# EAGLE board printbrd (EAGLE 7.6.0)
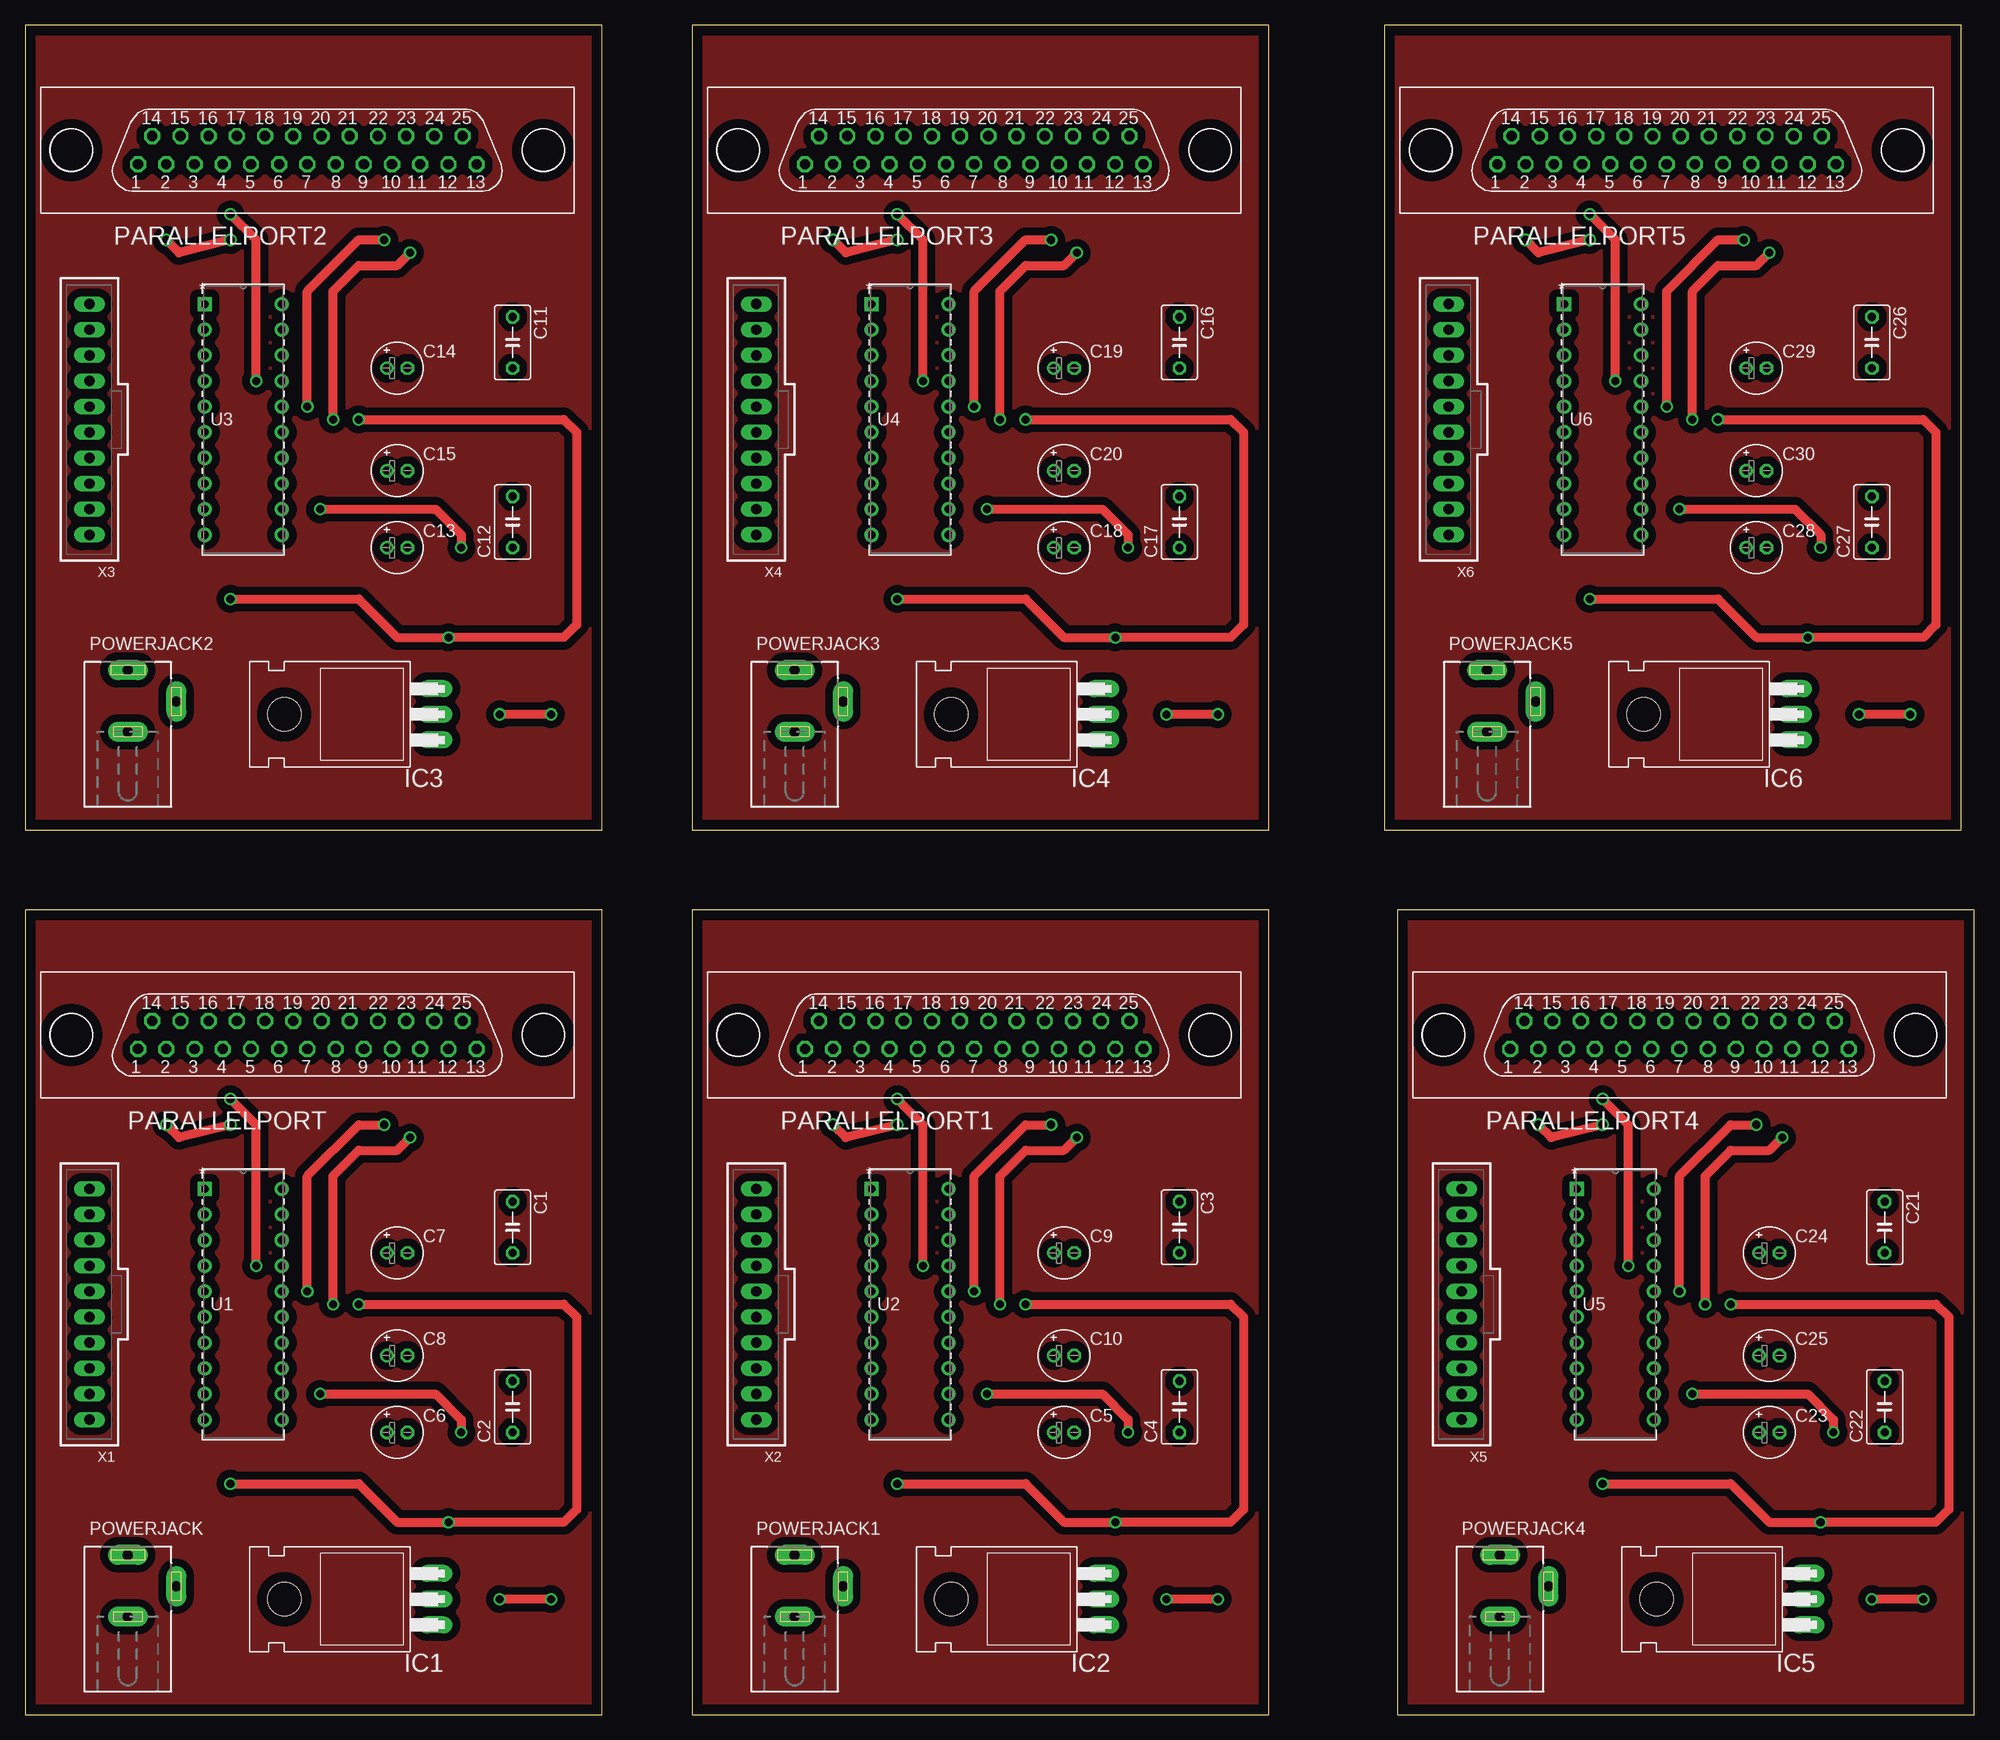
[diagram p0: board, top side]
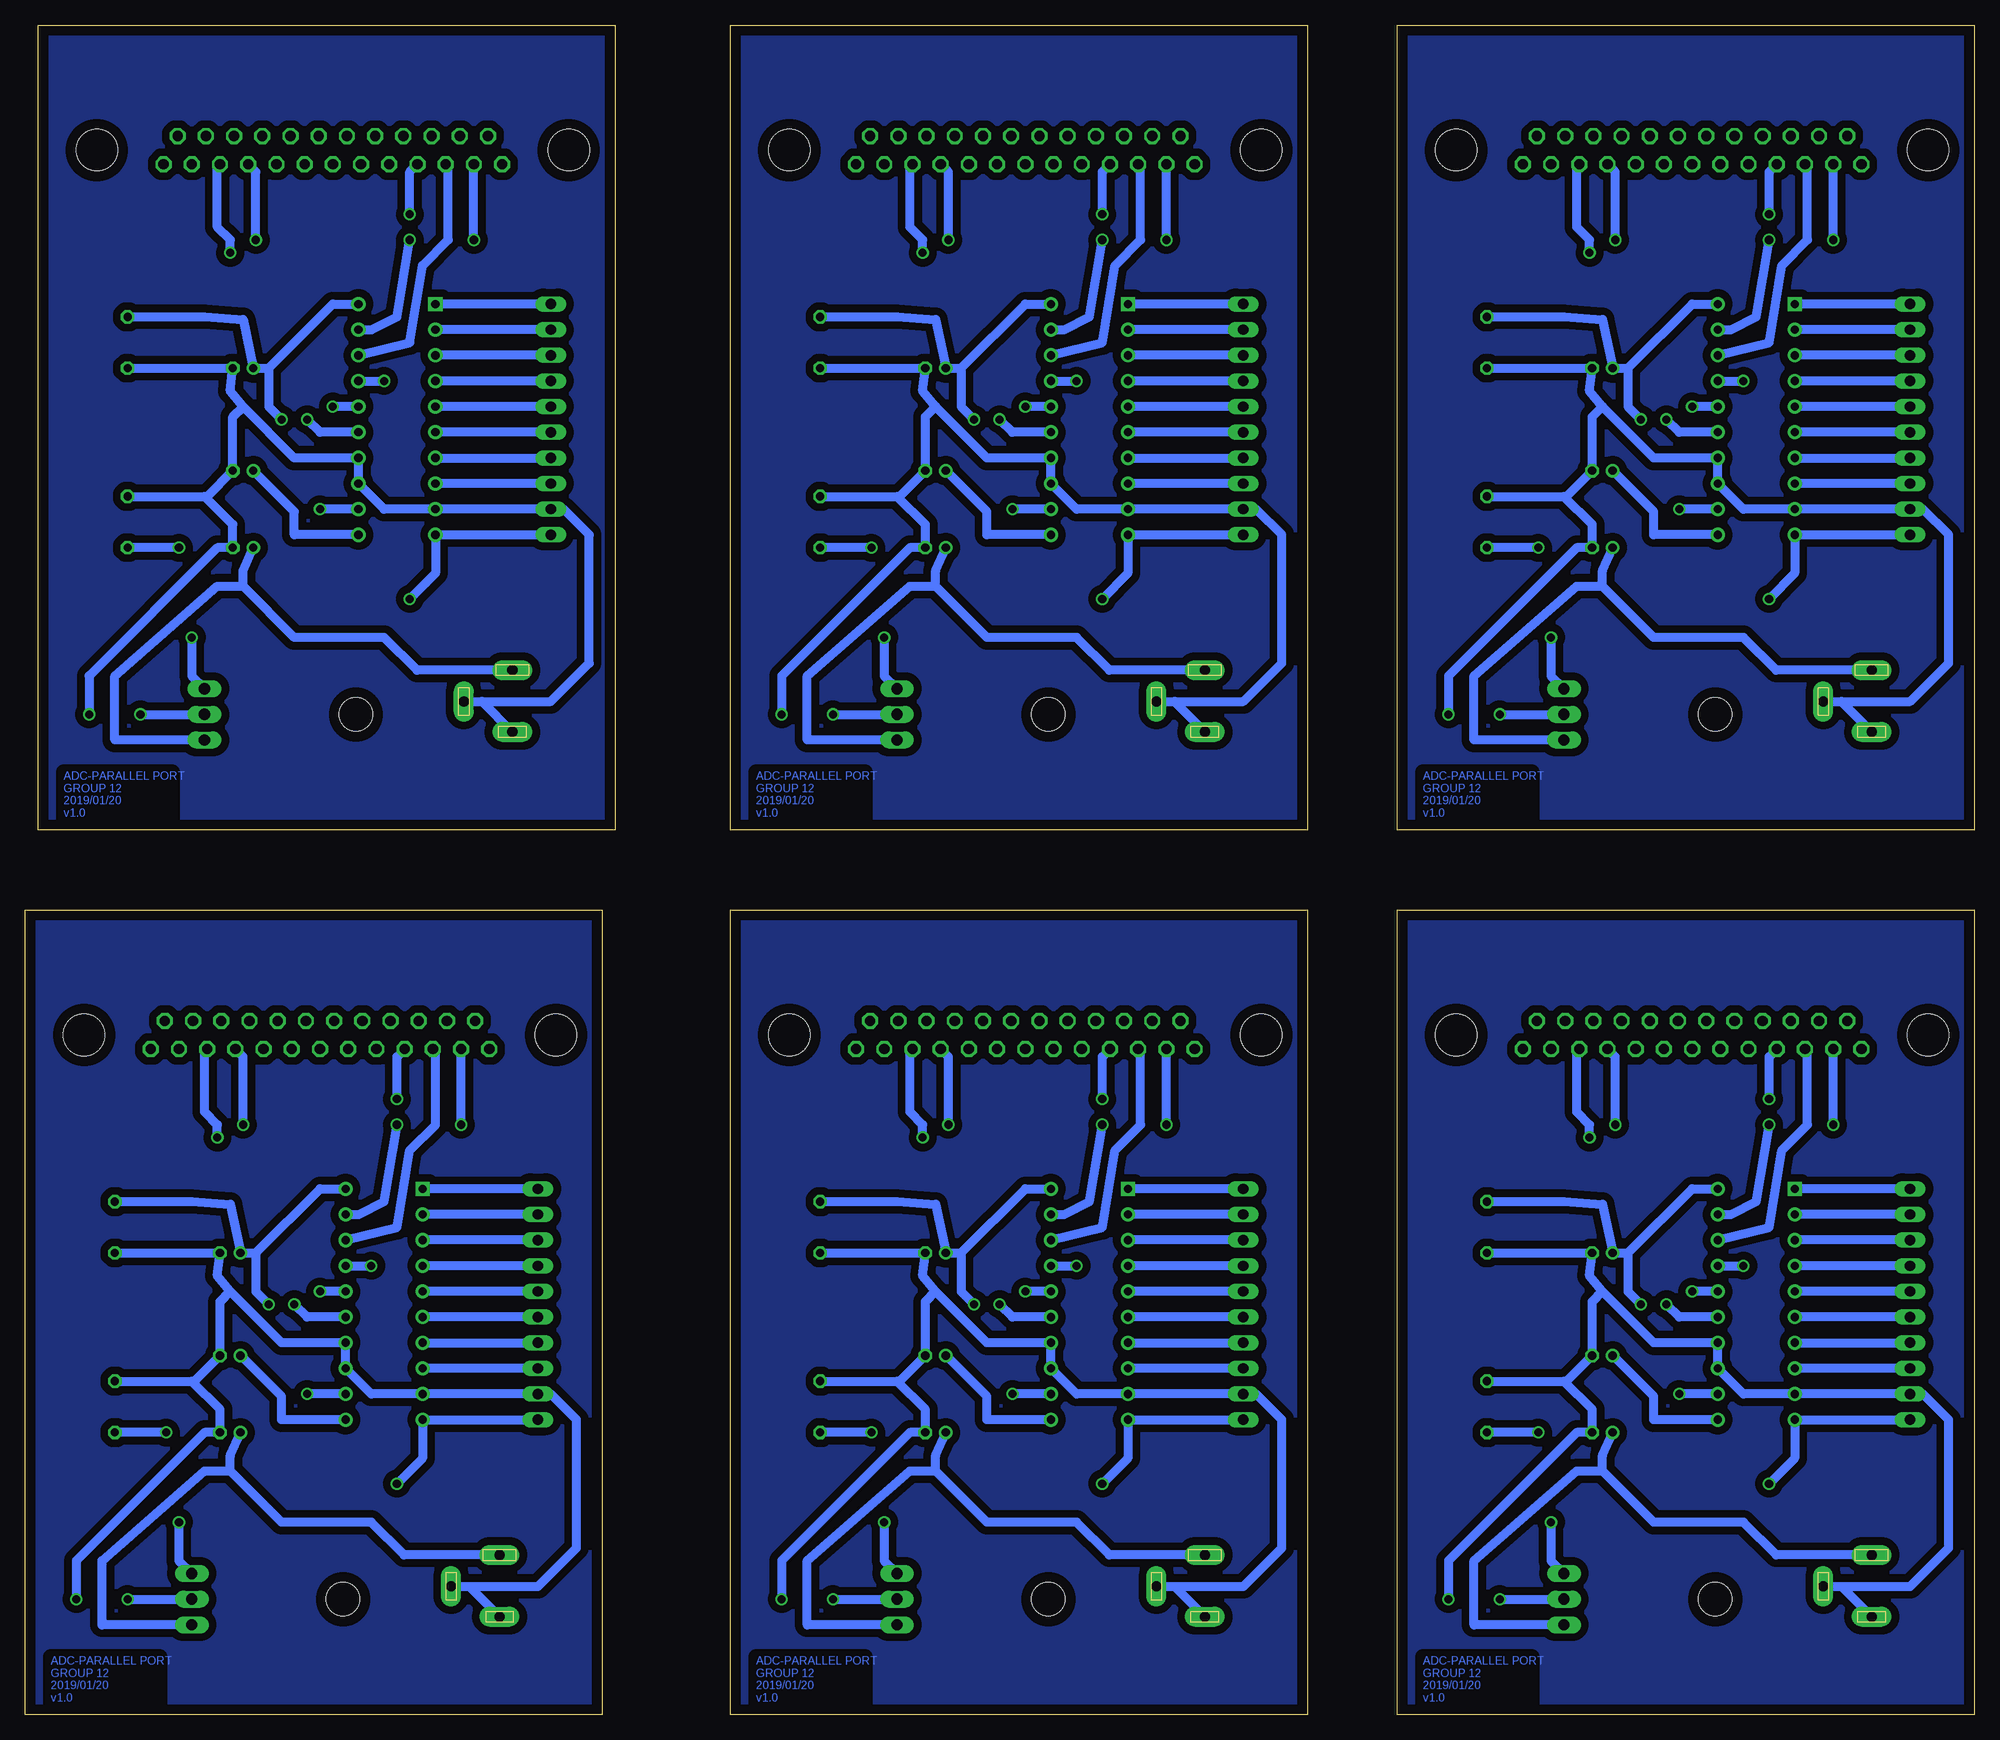
[diagram p1: board, bottom side, seen from below]

Size 193.02 x 167.31 mm. Coordinates in mm from the lower left corner, seen from the top.
Outline: 0,0 57.13,0 57.13,79.68 0,79.68 0,0
Outline: 66.04,0 123.17,0 123.17,79.68 66.04,79.68 66.04,0
Outline: 0,87.63 57.13,87.63 57.13,167.31 0,167.31 0,87.63
Outline: 66.04,87.63 123.17,87.63 123.17,167.31 66.04,167.31 66.04,87.63
Outline: 135.89,0 193.02,0 193.02,79.68 135.89,79.68 135.89,0
Outline: 134.62,87.63 191.75,87.63 191.75,167.31 134.62,167.31 134.62,87.63
Copper layers (1*16): Top 0.035mm / dielectric 1.5mm / Bottom 0.035mm
Design rules "default *": minimum track width 10mil, minimum drill 24mil, track to track 30mil, track to pad 30mil, pad to pad 30mil, via to via 30mil, smd to smd 30mil, copper to edge 40mil, drill to drill 8mil, minimum pad ring 10mil, minimum via ring 8mil, stop-mask expansion 4mil, vias tented up to drill 0mil, thermal gap 10mil

## Footprints (pad centres in the part's own frame; a part is rotated, then mirrored left to right if it is on the bottom)
C050-035X075 = drill 0.813 octagon: 1 -2.54,0; 2 2.54,0
E2-5 = drill 0.813 pad 1.27: + -1.016,0 | drill 0.813 pad 1.27 octagon: - 1.016,0
TO220H = drill 1.118 long: 1 -2.54,-10.16; 2 0,-10.16; 3 2.54,-10.16 | hole 3.302: 0,4.826
D-25F = drill 1.016 pad 1.575 octagon: 1 16.764,1.397; 2 13.97,1.397; 3 11.176,1.397; 4 8.382,1.397; 5 5.588,1.397; 6 2.794,1.397; 7 0,1.397; 8 -2.794,1.397; 9 -5.588,1.397; 10 -8.382,1.397; 11 -11.176,1.397; 12 -13.97,1.397; 13 -16.764,1.397; 14 15.367,-1.397; 15 12.573,-1.397; 16 9.779,-1.397; 17 6.985,-1.397; 18 4.191,-1.397; 19 1.397,-1.397; 20 -1.397,-1.397; 21 -4.191,-1.397; 22 -6.985,-1.397; 23 -9.779,-1.397; 24 -12.573,-1.397; 25 -15.367,-1.397 | hole 4.115: 23.368,0; -23.368,0
DCJ0202 = drill 1 pad 2 long: 1 0,3.1; 2 4.8,0; 3 0,-3
21-0043D_20 = drill 0.813 pad 1.397 square: 1 -7.62,22.86 | drill 0.813 pad 1.397: 2 -7.62,20.32; 3 -7.62,17.78; 4 -7.62,15.24; 5 -7.62,12.7; 6 -7.62,10.16; 7 -7.62,7.62; 8 -7.62,5.08; 9 -7.62,2.54; 10 -7.62,0; 11 0,0; 12 0,2.54; 13 0,5.08; 14 0,7.62; 15 0,10.16; 16 0,12.7; 17 0,15.24; 18 0,17.78; 19 0,20.32; 20 0,22.86
70543-10 = drill 1.016 long: 1 -11.43,0; 2 -8.89,0; 3 -6.35,0; 4 -3.81,0; 5 -1.27,0; 6 1.27,0; 7 3.81,0; 8 6.35,0; 9 8.89,0; 10 11.43,0

## Placement (x,y rotation side)
C1  0.1uF  [C050-035X075]  48.26,48.26 270 top
C2  0.01uF  [C050-035X075]  48.26,30.48 90 top
C3  0.1uF  [C050-035X075]  114.3,48.26 270 top
C4  0.01uF  [C050-035X075]  114.3,30.48 90 top
C5  10uf  [E2-5]  102.87,27.94 0 top
C6  10uf  [E2-5]  36.83,27.94 0 top
C7  1uf  [E2-5]  36.83,45.72 0 top
C8  4.7uF  [E2-5]  36.83,35.56 0 top
C9  1uf  [E2-5]  102.87,45.72 0 top
C10  4.7uF  [E2-5]  102.87,35.56 0 top
C11  0.1uF  [C050-035X075]  48.26,135.89 270 top
C12  0.01uF  [C050-035X075]  48.26,118.11 90 top
C13  10uf  [E2-5]  36.83,115.57 0 top
C14  1uf  [E2-5]  36.83,133.35 0 top
C15  4.7uF  [E2-5]  36.83,123.19 0 top
C16  0.1uF  [C050-035X075]  114.3,135.89 270 top
C17  0.01uF  [C050-035X075]  114.3,118.11 90 top
C18  10uf  [E2-5]  102.87,115.57 0 top
C19  1uf  [E2-5]  102.87,133.35 0 top
C20  4.7uF  [E2-5]  102.87,123.19 0 top
C21  0.1uF  [C050-035X075]  184.15,48.26 270 top
C22  0.01uF  [C050-035X075]  184.15,30.48 90 top
C23  10uf  [E2-5]  172.72,27.94 0 top
C24  1uf  [E2-5]  172.72,45.72 0 top
C25  4.7uF  [E2-5]  172.72,35.56 0 top
C26  0.1uF  [C050-035X075]  182.88,135.89 270 top
C27  0.01uF  [C050-035X075]  182.88,118.11 90 top
C28  10uf  [E2-5]  171.45,115.57 0 top
C29  1uf  [E2-5]  171.45,133.35 0 top
C30  4.7uF  [E2-5]  171.45,123.19 0 top
IC1  7806T  [TO220H]  30.48,11.43 90 top
IC2  7806T  [TO220H]  96.52,11.43 90 top
IC3  7806T  [TO220H]  30.48,99.06 90 top
IC4  7806T  [TO220H]  96.52,99.06 90 top
IC5  7806T  [TO220H]  166.37,11.43 90 top
IC6  7806T  [TO220H]  165.1,99.06 90 top
PARALLELPORT  [D-25F]  27.94,67.31 180 top
PARALLELPORT1  [D-25F]  93.98,67.31 180 top
PARALLELPORT2  [D-25F]  27.94,154.94 180 top
PARALLELPORT3  [D-25F]  93.98,154.94 180 top
PARALLELPORT4  [D-25F]  163.83,67.31 180 top
PARALLELPORT5  [D-25F]  162.56,154.94 180 top
POWERJACK  DCJ0202  [DCJ0202]  10.16,12.7 0 top
POWERJACK1  DCJ0202  [DCJ0202]  76.2,12.7 0 top
POWERJACK2  DCJ0202  [DCJ0202]  10.16,100.33 0 top
POWERJACK3  DCJ0202  [DCJ0202]  76.2,100.33 0 top
POWERJACK4  DCJ0202  [DCJ0202]  146.05,12.7 0 top
POWERJACK5  DCJ0202  [DCJ0202]  144.78,100.33 0 top
U1  MAX186DCPP  [21-0043D_20]  25.4,29.21 0 top
U2  MAX186DCPP  [21-0043D_20]  91.44,29.21 0 top
U3  MAX186DCPP  [21-0043D_20]  25.4,116.84 0 top
U4  MAX186DCPP  [21-0043D_20]  91.44,116.84 0 top
U5  MAX186DCPP  [21-0043D_20]  161.29,29.21 0 top
U6  MAX186DCPP  [21-0043D_20]  160.02,116.84 0 top
X1  C-GRID-10-70543  [70543-10]  6.35,40.64 90 top
X2  C-GRID-10-70543  [70543-10]  72.39,40.64 90 top
X3  C-GRID-10-70543  [70543-10]  6.35,128.27 90 top
X4  C-GRID-10-70543  [70543-10]  72.39,128.27 90 top
X5  C-GRID-10-70543  [70543-10]  142.24,40.64 90 top
X6  C-GRID-10-70543  [70543-10]  140.97,128.27 90 top

## Library data of the parts
C1 C3 C11 C16 C21 C26 = resistor; OC_NEWARK: unknown
C2 C4 C12 C17 C22 C27 = resistor; MPN: B32529C1103J189; OC_NEWARK: 94W2340
C5-C10 C13-C15 C18-C20 C23-C25 C28-C30 = rcl; OC_NEWARK: unknown
IC1-IC6 = linear; OC_NEWARK: unknown
PARALLELPORT PARALLELPORT1-PARALLELPORT5 = connect; OC_NEWARK: unknown
POWERJACK POWERJACK1-POWERJACK5 = con-jack; OC_FARNELL: unknown; OC_NEWARK: unknown
U1-U6 = max186; MANUFACTURER_PART_NUMBER: MAX186DCPP; OC_NEWARK: unknown; VENDOR: Maxim Integrated Products
X1-X6 = con-molex; OC_FARNELL: unknown; OC_NEWARK: unknown

## Nets
CH0: U1.1 X1.10
CH1: U1.2 X1.9
CH2: U1.3 X1.8
CH3: U1.4 X1.7
CH4: U1.5 X1.6
CH5: U1.6 X1.5
CH6: U1.7 X1.4
CH7: U1.8 X1.3
CH8: U2.1 X2.10
CH9: U2.2 X2.9
CH10: U2.3 X2.8
CH11: U2.4 X2.7
CH12: U2.5 X2.6
CH13: U2.6 X2.5
CH14: U2.7 X2.4
CH15: U2.8 X2.3
CH16: U3.1 X3.10
CH17: U3.2 X3.9
CH18: U3.3 X3.8
CH19: U3.4 X3.7
CH20: U3.5 X3.6
CH21: U3.6 X3.5
CH22: U3.7 X3.4
CH23: U3.8 X3.3
CH24: U4.1 X4.10
CH25: U4.2 X4.9
CH26: U4.3 X4.8
CH27: U4.4 X4.7
CH28: U4.5 X4.6
CH29: U4.6 X4.5
CH30: U4.7 X4.4
CH31: U4.8 X4.3
CH32: U5.1 X5.10
CH33: U5.2 X5.9
CH34: U5.3 X5.8
CH35: U5.4 X5.7
CH36: U5.5 X5.6
CH37: U5.6 X5.5
CH38: U5.7 X5.4
CH39: U5.8 X5.3
CH40: U6.1 X6.10
CH41: U6.2 X6.9
CH42: U6.3 X6.8
CH43: U6.4 X6.7
CH44: U6.5 X6.6
CH45: U6.6 X6.5
CH46: U6.7 X6.4
CH47: U6.8 X6.3
CS: PARALLELPORT.3 U1.18
CS1: PARALLELPORT1.3 U2.18
CS2: PARALLELPORT2.3 U3.18
CS3: PARALLELPORT3.3 U4.18
CS4: PARALLELPORT4.3 U5.18
CS5: PARALLELPORT5.3 U6.18
DIN: PARALLELPORT.4 U1.17
DIN1: PARALLELPORT1.4 U2.17
DIN2: PARALLELPORT2.4 U3.17
DIN3: PARALLELPORT3.4 U4.17
DIN4: PARALLELPORT4.4 U5.17
DIN5: PARALLELPORT5.4 U6.17
DOUT: PARALLELPORT.11 U1.15
DOUT1: PARALLELPORT1.11 U2.15
DOUT2: PARALLELPORT2.11 U3.15
DOUT3: PARALLELPORT3.11 U4.15
DOUT4: PARALLELPORT4.11 U5.15
DOUT5: PARALLELPORT5.11 U6.15
GND: C1.2 C2.2 C6.- C7.- C8.- IC1.2 POWERJACK.2 POWERJACK.3 U1.9 U1.13 U1.14 X1.2
GND1: C3.2 C4.2 C5.- C9.- C10.- IC2.2 POWERJACK1.2 POWERJACK1.3 U2.9 U2.13 U2.14 X2.2
GND2: C11.2 C12.2 C13.- C14.- C15.- IC3.2 POWERJACK2.2 POWERJACK2.3 U3.9 U3.13 U3.14 X3.2
GND3: C16.2 C17.2 C18.- C19.- C20.- IC4.2 POWERJACK3.2 POWERJACK3.3 U4.9 U4.13 U4.14 X4.2
GND4: C21.2 C22.2 C23.- C24.- C25.- IC5.2 POWERJACK4.2 POWERJACK4.3 U5.9 U5.13 U5.14 X5.2
GND5: C26.2 C27.2 C28.- C29.- C30.- IC6.2 POWERJACK5.2 POWERJACK5.3 U6.9 U6.13 U6.14 X6.2
REFAD: C2.1 U1.12
REFAD1: C4.1 U2.12
REFAD2: C12.1 U3.12
REFAD3: C17.1 U4.12
REFAD4: C22.1 U5.12
REFAD5: C27.1 U6.12
SCLK: PARALLELPORT.2 U1.19
SCLK1: PARALLELPORT1.2 U2.19
SCLK2: PARALLELPORT2.2 U3.19
SCLK3: PARALLELPORT3.2 U4.19
SCLK4: PARALLELPORT4.2 U5.19
SCLK5: PARALLELPORT5.2 U6.19
SSTRB: PARALLELPORT.10 U1.16
SSTRB1: PARALLELPORT1.10 U2.16
SSTRB2: PARALLELPORT2.10 U3.16
SSTRB3: PARALLELPORT3.10 U4.16
SSTRB4: PARALLELPORT4.10 U5.16
SSTRB5: PARALLELPORT5.10 U6.16
VCC: C1.1 C7.+ IC1.3 U1.10 U1.20 X1.1
VCC1: C3.1 C9.+ IC2.3 U2.10 U2.20 X2.1
VCC2: C11.1 C14.+ IC3.3 U3.10 U3.20 X3.1
VCC3: C16.1 C19.+ IC4.3 U4.10 U4.20 X4.1
VCC4: C21.1 C24.+ IC5.3 U5.10 U5.20 X5.1
VCC5: C26.1 C29.+ IC6.3 U6.10 U6.20 X6.1
VIN: C6.+ IC1.1 POWERJACK.1
VIN1: C5.+ IC2.1 POWERJACK1.1
VIN2: C13.+ IC3.1 POWERJACK2.1
VIN3: C18.+ IC4.1 POWERJACK3.1
VIN4: C23.+ IC5.1 POWERJACK4.1
VIN5: C28.+ IC6.1 POWERJACK5.1
VREF: C8.+ U1.11
VREF1: C10.+ U2.11
VREF2: C15.+ U3.11
VREF3: C20.+ U4.11
VREF4: C25.+ U5.11
VREF5: C30.+ U6.11

## Tracks (layer width: path | path; a pad name or v marks a point on that pad's centre or on a via)
CH0
  Bottom 0.889: X1.10 U1.1
CH1
  Bottom 0.889: X1.9 U1.2
CH2
  Bottom 0.889: X1.8 U1.3
CH3
  Bottom 0.889: X1.7 U1.4
CH4
  Bottom 0.889: X1.6 U1.5
CH5
  Bottom 0.889: X1.5 U1.6
CH6
  Bottom 0.889: U1.7 X1.4
CH7
  Bottom 0.889: X1.3 U1.8
CH8
  Bottom 0.889: X2.10 U2.1
CH9
  Bottom 0.889: X2.9 U2.2
CH10
  Bottom 0.889: X2.8 U2.3
CH11
  Bottom 0.889: X2.7 U2.4
CH12
  Bottom 0.889: X2.6 U2.5
CH13
  Bottom 0.889: X2.5 U2.6
CH14
  Bottom 0.889: U2.7 X2.4
CH15
  Bottom 0.889: X2.3 U2.8
CH16
  Bottom 0.889: X3.10 U3.1
CH17
  Bottom 0.889: X3.9 U3.2
CH18
  Bottom 0.889: X3.8 U3.3
CH19
  Bottom 0.889: X3.7 U3.4
CH20
  Bottom 0.889: X3.6 U3.5
CH21
  Bottom 0.889: X3.5 U3.6
CH22
  Bottom 0.889: U3.7 X3.4
CH23
  Bottom 0.889: X3.3 U3.8
CH24
  Bottom 0.889: X4.10 U4.1
CH25
  Bottom 0.889: X4.9 U4.2
CH26
  Bottom 0.889: X4.8 U4.3
CH27
  Bottom 0.889: X4.7 U4.4
CH28
  Bottom 0.889: X4.6 U4.5
CH29
  Bottom 0.889: X4.5 U4.6
CH30
  Bottom 0.889: U4.7 X4.4
CH31
  Bottom 0.889: X4.3 U4.8
CH32
  Bottom 0.889: X5.10 U5.1
CH33
  Bottom 0.889: X5.9 U5.2
CH34
  Bottom 0.889: X5.8 U5.3
CH35
  Bottom 0.889: X5.7 U5.4
CH36
  Bottom 0.889: X5.6 U5.5
CH37
  Bottom 0.889: X5.5 U5.6
CH38
  Bottom 0.889: U5.7 X5.4
CH39
  Bottom 0.889: X5.3 U5.8
CH40
  Bottom 0.889: X6.10 U6.1
CH41
  Bottom 0.889: X6.9 U6.2
CH42
  Bottom 0.889: X6.8 U6.3
CH43
  Bottom 0.889: X6.7 U6.4
CH44
  Bottom 0.889: X6.6 U6.5
CH45
  Bottom 0.889: X6.5 U6.6
CH46
  Bottom 0.889: U6.7 X6.4
CH47
  Bottom 0.889: X6.3 U6.8
CS
  Bottom 0.889: U1.18 20.32,48.26 19.05,55.88 16.51,58.42 16.51,65.66 PARALLELPORT.3
CS1
  Bottom 0.889: U2.18 86.36,48.26 85.09,55.88 82.55,58.42 82.55,65.66 PARALLELPORT1.3
CS2
  Bottom 0.889: U3.18 20.32,135.89 19.05,143.51 16.51,146.05 16.51,153.29 PARALLELPORT2.3
CS3
  Bottom 0.889: U4.18 86.36,135.89 85.09,143.51 82.55,146.05 82.55,153.29 PARALLELPORT3.3
CS4
  Bottom 0.889: U5.18 156.21,48.26 154.94,55.88 152.4,58.42 152.4,65.66 PARALLELPORT4.3
CS5
  Bottom 0.889: U6.18 154.94,135.89 153.67,143.51 151.13,146.05 151.13,153.29 PARALLELPORT5.3
DIN  (via drill 0.8, 0.8 pad 0.81)
  Top 0.889: v22.86,44.45 22.86,58.42 v20.32,60.96
  Bottom 0.889: U1.17 v22.86,44.45 | v20.32,60.96 20.32,65.15 PARALLELPORT.4
DIN1  (via drill 0.8, 0.8 pad 0.81)
  Top 0.889: v88.9,44.45 88.9,58.42 v86.36,60.96
  Bottom 0.889: U2.17 v88.9,44.45 | v86.36,60.96 86.36,65.15 PARALLELPORT1.4
DIN2  (via drill 0.8, 0.8 pad 0.81)
  Top 0.889: v22.86,132.08 22.86,146.05 v20.32,148.59
  Bottom 0.889: U3.17 v22.86,132.08 | v20.32,148.59 20.32,152.78 PARALLELPORT2.4
DIN3  (via drill 0.8, 0.8 pad 0.81)
  Top 0.889: v88.9,132.08 88.9,146.05 v86.36,148.59
  Bottom 0.889: U4.17 v88.9,132.08 | v86.36,148.59 86.36,152.78 PARALLELPORT3.4
DIN4  (via drill 0.8, 0.8 pad 0.81)
  Top 0.889: v158.75,44.45 158.75,58.42 v156.21,60.96
  Bottom 0.889: U5.17 v158.75,44.45 | v156.21,60.96 156.21,65.15 PARALLELPORT4.4
DIN5  (via drill 0.8, 0.8 pad 0.81)
  Top 0.889: v157.48,132.08 157.48,146.05 v154.94,148.59
  Bottom 0.889: U6.17 v157.48,132.08 | v154.94,148.59 154.94,152.78 PARALLELPORT5.4
DOUT  (via drill 0.8)
  Top 0.889: v30.48,40.64 30.48,53.34 33.02,55.88 36.83,55.88 v38.1,57.15
  Bottom 0.889: U1.15 29.21,39.37 v30.48,40.64 | v38.1,57.15 38.1,58.42 39.37,59.69 39.37,65.66 PARALLELPORT.11
DOUT1  (via drill 0.8)
  Top 0.889: v96.52,40.64 96.52,53.34 99.06,55.88 102.87,55.88 v104.14,57.15
  Bottom 0.889: U2.15 95.25,39.37 v96.52,40.64 | v104.14,57.15 104.14,58.42 105.41,59.69 105.41,65.66 PARALLELPORT1.11
DOUT2  (via drill 0.8)
  Top 0.889: v30.48,128.27 30.48,140.97 33.02,143.51 36.83,143.51 v38.1,144.78
  Bottom 0.889: U3.15 29.21,127 v30.48,128.27 | v38.1,144.78 38.1,146.05 39.37,147.32 39.37,153.29 PARALLELPORT2.11
DOUT3  (via drill 0.8)
  Top 0.889: v96.52,128.27 96.52,140.97 99.06,143.51 102.87,143.51 v104.14,144.78
  Bottom 0.889: U4.15 95.25,127 v96.52,128.27 | v104.14,144.78 104.14,146.05 105.41,147.32 105.41,153.29 PARALLELPORT3.11
DOUT4  (via drill 0.8)
  Top 0.889: v166.37,40.64 166.37,53.34 168.91,55.88 172.72,55.88 v173.99,57.15
  Bottom 0.889: U5.15 165.1,39.37 v166.37,40.64 | v173.99,57.15 173.99,58.42 175.26,59.69 175.26,65.66 PARALLELPORT4.11
DOUT5  (via drill 0.8)
  Top 0.889: v165.1,128.27 165.1,140.97 167.64,143.51 171.45,143.51 v172.72,144.78
  Bottom 0.889: U6.15 163.83,127 v165.1,128.27 | v172.72,144.78 172.72,146.05 173.99,147.32 173.99,153.29 PARALLELPORT5.11
GND  (via drill 0.8)
  Top 0.889: v52.07,11.43 v46.99,11.43
  Bottom 0.406: POWERJACK.2 13.16,12.7
  Bottom 0.889: 13.16,12.7 POWERJACK.3 | 36.83,41.91 31.75,36.83 U1.14 U1.13 22.86,31.75 U1.9 X1.2 5.08,31.75 2.54,29.21 2.54,16.51 6.35,12.7 POWERJACK.2 | 36.83,41.91 38.1,43.43 C7.- C1.2 | C2.2 40.64,33.02 | 40.64,33.02 40.39,33.02 C8.- 37.85,40.89 36.83,41.91 | 40.64,33.02 37.85,30.23 C6.- 39.37,27.94 52.07,15.24 v52.07,11.43 | v46.99,11.43 IC1.2
GND1  (via drill 0.8)
  Top 0.889: v118.11,11.43 v113.03,11.43
  Bottom 0.406: POWERJACK1.2 79.2,12.7
  Bottom 0.889: 79.2,12.7 POWERJACK1.3 | 102.87,41.91 97.79,36.83 U2.14 U2.13 88.9,31.75 U2.9 X2.2 71.12,31.75 68.58,29.21 68.58,16.51 72.39,12.7 POWERJACK1.2 | 102.87,41.91 104.14,43.43 C9.- C3.2 | C4.2 106.68,33.02 | 106.68,33.02 106.43,33.02 C10.- 103.89,40.89 102.87,41.91 | 106.68,33.02 103.89,30.23 C5.- 105.41,27.94 118.11,15.24 v118.11,11.43 | v113.03,11.43 IC2.2
GND2  (via drill 0.8)
  Top 0.889: v52.07,99.06 v46.99,99.06
  Bottom 0.406: POWERJACK2.2 13.16,100.33
  Bottom 0.889: 13.16,100.33 POWERJACK2.3 | 36.83,129.54 31.75,124.46 U3.14 U3.13 22.86,119.38 U3.9 X3.2 5.08,119.38 2.54,116.84 2.54,104.14 6.35,100.33 POWERJACK2.2 | 36.83,129.54 38.1,131.06 C14.- C11.2 | C12.2 40.64,120.65 | 40.64,120.65 40.39,120.65 C15.- 37.85,128.52 36.83,129.54 | 40.64,120.65 37.85,117.86 C13.- 39.37,115.57 52.07,102.87 v52.07,99.06 | v46.99,99.06 IC3.2
GND3  (via drill 0.8)
  Top 0.889: v118.11,99.06 v113.03,99.06
  Bottom 0.406: POWERJACK3.2 79.2,100.33
  Bottom 0.889: 79.2,100.33 POWERJACK3.3 | 102.87,129.54 97.79,124.46 U4.14 U4.13 88.9,119.38 U4.9 X4.2 71.12,119.38 68.58,116.84 68.58,104.14 72.39,100.33 POWERJACK3.2 | 102.87,129.54 104.14,131.06 C19.- C16.2 | C17.2 106.68,120.65 | 106.68,120.65 106.43,120.65 C20.- 103.89,128.52 102.87,129.54 | 106.68,120.65 103.89,117.86 C18.- 105.41,115.57 118.11,102.87 v118.11,99.06 | v113.03,99.06 IC4.2
GND4  (via drill 0.8)
  Top 0.889: v187.96,11.43 v182.88,11.43
  Bottom 0.406: POWERJACK4.2 149.05,12.7
  Bottom 0.889: 149.05,12.7 POWERJACK4.3 | 172.72,41.91 167.64,36.83 U5.14 U5.13 158.75,31.75 U5.9 X5.2 140.97,31.75 138.43,29.21 138.43,16.51 142.24,12.7 POWERJACK4.2 | 172.72,41.91 173.99,43.43 C24.- C21.2 | C22.2 176.53,33.02 | 176.53,33.02 176.28,33.02 C25.- 173.74,40.89 172.72,41.91 | 176.53,33.02 173.74,30.23 C23.- 175.26,27.94 187.96,15.24 v187.96,11.43 | v182.88,11.43 IC5.2
GND5  (via drill 0.8)
  Top 0.889: v186.69,99.06 v181.61,99.06
  Bottom 0.406: POWERJACK5.2 147.78,100.33
  Bottom 0.889: 147.78,100.33 POWERJACK5.3 | 171.45,129.54 166.37,124.46 U6.14 U6.13 157.48,119.38 U6.9 X6.2 139.7,119.38 137.16,116.84 137.16,104.14 140.97,100.33 POWERJACK5.2 | 171.45,129.54 172.72,131.06 C29.- C26.2 | C27.2 175.26,120.65 | 175.26,120.65 175.01,120.65 C30.- 172.47,128.52 171.45,129.54 | 175.26,120.65 172.47,117.86 C28.- 173.99,115.57 186.69,102.87 v186.69,99.06 | v181.61,99.06 IC6.2
N$1
  pour Top: 0,80.01 57.15,80.01 57.15,0 0,0
N$2
  pour Bottom: 0,80.01 57.15,80.01 57.15,78.74 57.15,0 0,0
N$3
  pour Top: 66.04,80.01 123.19,80.01 123.19,0 66.04,0
N$4
  pour Bottom: 66.04,80.01 123.19,80.01 123.19,78.74 123.19,0 66.04,0
N$5
  pour Top: 0,167.64 57.15,167.64 57.15,87.63 0,87.63
N$6
  pour Bottom: 0,167.64 57.15,167.64 57.15,166.37 57.15,87.63 0,87.63
N$7
  pour Top: 66.04,167.64 123.19,167.64 123.19,87.63 66.04,87.63
N$8
  pour Bottom: 66.04,167.64 123.19,167.64 123.19,166.37 123.19,87.63 66.04,87.63
N$9
  pour Top: 135.89,80.01 193.04,80.01 193.04,0 135.89,0
N$10
  pour Bottom: 135.89,80.01 193.04,80.01 193.04,78.74 193.04,0 135.89,0
N$11
  pour Top: 134.62,167.64 191.77,167.64 191.77,87.63 134.62,87.63
N$12
  pour Bottom: 134.62,167.64 191.77,167.64 191.77,166.37 191.77,87.63 134.62,87.63
REFAD  (via drill 0.8)
  Top 0.889: v29.21,31.75 40.64,31.75 43.18,29.21 v43.18,27.94
  Bottom 0.889: U1.12 v29.21,31.75 | v43.18,27.94 C2.1
REFAD1  (via drill 0.8)
  Top 0.889: v95.25,31.75 106.68,31.75 109.22,29.21 v109.22,27.94
  Bottom 0.889: U2.12 v95.25,31.75 | v109.22,27.94 C4.1
REFAD2  (via drill 0.8)
  Top 0.889: v29.21,119.38 40.64,119.38 43.18,116.84 v43.18,115.57
  Bottom 0.889: U3.12 v29.21,119.38 | v43.18,115.57 C12.1
REFAD3  (via drill 0.8)
  Top 0.889: v95.25,119.38 106.68,119.38 109.22,116.84 v109.22,115.57
  Bottom 0.889: U4.12 v95.25,119.38 | v109.22,115.57 C17.1
REFAD4  (via drill 0.8)
  Top 0.889: v165.1,31.75 176.53,31.75 179.07,29.21 v179.07,27.94
  Bottom 0.889: U5.12 v165.1,31.75 | v179.07,27.94 C22.1
REFAD5  (via drill 0.8)
  Top 0.889: v163.83,119.38 175.26,119.38 177.8,116.84 v177.8,115.57
  Bottom 0.889: U6.12 v163.83,119.38 | v177.8,115.57 C27.1
SCLK  (via drill 0.8)
  Top 0.889: v20.32,58.42 15.24,57.15 v13.97,58.42
  Bottom 0.889: U1.19 24.13,49.53 21.59,50.8 v20.32,58.42 | v13.97,58.42 PARALLELPORT.2
SCLK1  (via drill 0.8)
  Top 0.889: v86.36,58.42 81.28,57.15 v80.01,58.42
  Bottom 0.889: U2.19 90.17,49.53 87.63,50.8 v86.36,58.42 | v80.01,58.42 PARALLELPORT1.2
SCLK2  (via drill 0.8)
  Top 0.889: v20.32,146.05 15.24,144.78 v13.97,146.05
  Bottom 0.889: U3.19 24.13,137.16 21.59,138.43 v20.32,146.05 | v13.97,146.05 PARALLELPORT2.2
SCLK3  (via drill 0.8)
  Top 0.889: v86.36,146.05 81.28,144.78 v80.01,146.05
  Bottom 0.889: U4.19 90.17,137.16 87.63,138.43 v86.36,146.05 | v80.01,146.05 PARALLELPORT3.2
SCLK4  (via drill 0.8)
  Top 0.889: v156.21,58.42 151.13,57.15 v149.86,58.42
  Bottom 0.889: U5.19 160.02,49.53 157.48,50.8 v156.21,58.42 | v149.86,58.42 PARALLELPORT4.2
SCLK5  (via drill 0.8)
  Top 0.889: v154.94,146.05 149.86,144.78 v148.59,146.05
  Bottom 0.889: U6.19 158.75,137.16 156.21,138.43 v154.94,146.05 | v148.59,146.05 PARALLELPORT5.2
SSTRB  (via drill 0.8)
  Top 0.889: v27.94,41.91 27.94,53.34 33.02,58.42 v35.56,58.42
  Bottom 0.889: U1.16 v27.94,41.91 | v35.56,58.42 35.56,65.15 PARALLELPORT.10
SSTRB1  (via drill 0.8)
  Top 0.889: v93.98,41.91 93.98,53.34 99.06,58.42 v101.6,58.42
  Bottom 0.889: U2.16 v93.98,41.91 | v101.6,58.42 101.6,65.15 PARALLELPORT1.10
SSTRB2  (via drill 0.8)
  Top 0.889: v27.94,129.54 27.94,140.97 33.02,146.05 v35.56,146.05
  Bottom 0.889: U3.16 v27.94,129.54 | v35.56,146.05 35.56,152.78 PARALLELPORT2.10
SSTRB3  (via drill 0.8)
  Top 0.889: v93.98,129.54 93.98,140.97 99.06,146.05 v101.6,146.05
  Bottom 0.889: U4.16 v93.98,129.54 | v101.6,146.05 101.6,152.78 PARALLELPORT3.10
SSTRB4  (via drill 0.8)
  Top 0.889: v163.83,41.91 163.83,53.34 168.91,58.42 v171.45,58.42
  Bottom 0.889: U5.16 v163.83,41.91 | v171.45,58.42 171.45,65.15 PARALLELPORT4.10
SSTRB5  (via drill 0.8)
  Top 0.889: v162.56,129.54 162.56,140.97 167.64,146.05 v170.18,146.05
  Bottom 0.889: U6.16 v162.56,129.54 | v170.18,146.05 170.18,152.78 PARALLELPORT5.10
VCC  (via drill 0.8)
  Top 0.889: v20.32,22.86 33.02,22.86 36.83,19.05 v41.91,19.05 53.34,19.05 54.61,20.32 54.61,39.37 53.34,40.64 v33.02,40.64
  Bottom 0.889: v20.32,22.86 17.78,25.4 U1.10 X1.1 | v41.91,19.05 41.91,15.24 IC1.3 | 34.29,45.72 C7.+ 36.83,50.55 40.64,50.8 C1.1 | 34.29,45.72 27.94,52.07 U1.20 | 34.29,45.72 34.29,41.91 v33.02,40.64
VCC1  (via drill 0.8)
  Top 0.889: v86.36,22.86 99.06,22.86 102.87,19.05 v107.95,19.05 119.38,19.05 120.65,20.32 120.65,39.37 119.38,40.64 v99.06,40.64
  Bottom 0.889: v86.36,22.86 83.82,25.4 U2.10 X2.1 | v107.95,19.05 107.95,15.24 IC2.3 | 100.33,45.72 C9.+ 102.87,50.55 106.68,50.8 C3.1 | 100.33,45.72 93.98,52.07 U2.20 | 100.33,45.72 100.33,41.91 v99.06,40.64
VCC2  (via drill 0.8)
  Top 0.889: v20.32,110.49 33.02,110.49 36.83,106.68 v41.91,106.68 53.34,106.68 54.61,107.95 54.61,127 53.34,128.27 v33.02,128.27
  Bottom 0.889: v20.32,110.49 17.78,113.03 U3.10 X3.1 | v41.91,106.68 41.91,102.87 IC3.3 | 34.29,133.35 C14.+ 36.83,138.18 40.64,138.43 C11.1 | 34.29,133.35 27.94,139.7 U3.20 | 34.29,133.35 34.29,129.54 v33.02,128.27
VCC3  (via drill 0.8)
  Top 0.889: v86.36,110.49 99.06,110.49 102.87,106.68 v107.95,106.68 119.38,106.68 120.65,107.95 120.65,127 119.38,128.27 v99.06,128.27
  Bottom 0.889: v86.36,110.49 83.82,113.03 U4.10 X4.1 | v107.95,106.68 107.95,102.87 IC4.3 | 100.33,133.35 C19.+ 102.87,138.18 106.68,138.43 C16.1 | 100.33,133.35 93.98,139.7 U4.20 | 100.33,133.35 100.33,129.54 v99.06,128.27
VCC4  (via drill 0.8)
  Top 0.889: v156.21,22.86 168.91,22.86 172.72,19.05 v177.8,19.05 189.23,19.05 190.5,20.32 190.5,39.37 189.23,40.64 v168.91,40.64
  Bottom 0.889: v156.21,22.86 153.67,25.4 U5.10 X5.1 | v177.8,19.05 177.8,15.24 IC5.3 | 170.18,45.72 C24.+ 172.72,50.55 176.53,50.8 C21.1 | 170.18,45.72 163.83,52.07 U5.20 | 170.18,45.72 170.18,41.91 v168.91,40.64
VCC5  (via drill 0.8)
  Top 0.889: v154.94,110.49 167.64,110.49 171.45,106.68 v176.53,106.68 187.96,106.68 189.23,107.95 189.23,127 187.96,128.27 v167.64,128.27
  Bottom 0.889: v154.94,110.49 152.4,113.03 U6.10 X6.1 | v176.53,106.68 176.53,102.87 IC6.3 | 168.91,133.35 C29.+ 171.45,138.18 175.26,138.43 C26.1 | 168.91,133.35 162.56,139.7 U6.20 | 168.91,133.35 168.91,129.54 v167.64,128.27
VIN
  Bottom 0.889: IC1.1 49.53,8.89 49.53,15.24 39.37,24.13 36.83,24.13 | 36.83,24.13 36.83,25.65 C6.+ | POWERJACK.1 19.61,15.8 22.86,19.05 31.75,19.05 36.83,24.13
VIN1
  Bottom 0.889: IC2.1 115.57,8.89 115.57,15.24 105.41,24.13 102.87,24.13 | 102.87,24.13 102.87,25.65 C5.+ | POWERJACK1.1 85.65,15.8 88.9,19.05 97.79,19.05 102.87,24.13
VIN2
  Bottom 0.889: IC3.1 49.53,96.52 49.53,102.87 39.37,111.76 36.83,111.76 | 36.83,111.76 36.83,113.28 C13.+ | POWERJACK2.1 19.61,103.43 22.86,106.68 31.75,106.68 36.83,111.76
VIN3
  Bottom 0.889: IC4.1 115.57,96.52 115.57,102.87 105.41,111.76 102.87,111.76 | 102.87,111.76 102.87,113.28 C18.+ | POWERJACK3.1 85.65,103.43 88.9,106.68 97.79,106.68 102.87,111.76
VIN4
  Bottom 0.889: IC5.1 185.42,8.89 185.42,15.24 175.26,24.13 172.72,24.13 | 172.72,24.13 172.72,25.65 C23.+ | POWERJACK4.1 155.5,15.8 158.75,19.05 167.64,19.05 172.72,24.13
VIN5
  Bottom 0.889: IC6.1 184.15,96.52 184.15,102.87 173.99,111.76 171.45,111.76 | 171.45,111.76 171.45,113.28 C28.+ | POWERJACK5.1 154.23,103.43 157.48,106.68 166.37,106.68 171.45,111.76
VREF
  Bottom 0.889: U1.11 31.75,29.21 31.75,31.5 C8.+
VREF1
  Bottom 0.889: U2.11 97.79,29.21 97.79,31.5 C10.+
VREF2
  Bottom 0.889: U3.11 31.75,116.84 31.75,119.13 C15.+
VREF3
  Bottom 0.889: U4.11 97.79,116.84 97.79,119.13 C20.+
VREF4
  Bottom 0.889: U5.11 167.64,29.21 167.64,31.5 C25.+
VREF5
  Bottom 0.889: U6.11 166.37,116.84 166.37,119.13 C30.+

## Text on the board
Bottom: ADC-PARALLEL PORT / GROUP 12 / 2019/01/20 / v1.0 | ADC-PARALLEL PORT / GROUP 12 / 2019/01/20 / v1.0 | ADC-PARALLEL PORT / GROUP 12 / 2019/01/20 / v1.0 | ADC-PARALLEL PORT / GROUP 12 / 2019/01/20 / v1.0 | ADC-PARALLEL PORT / GROUP 12 / 2019/01/20 / v1.0 | ADC-PARALLEL PORT / GROUP 12 / 2019/01/20 / v1.0